# EAGLE board krajBB-Mojžiš_Matej7 (EAGLE 7.7.0)
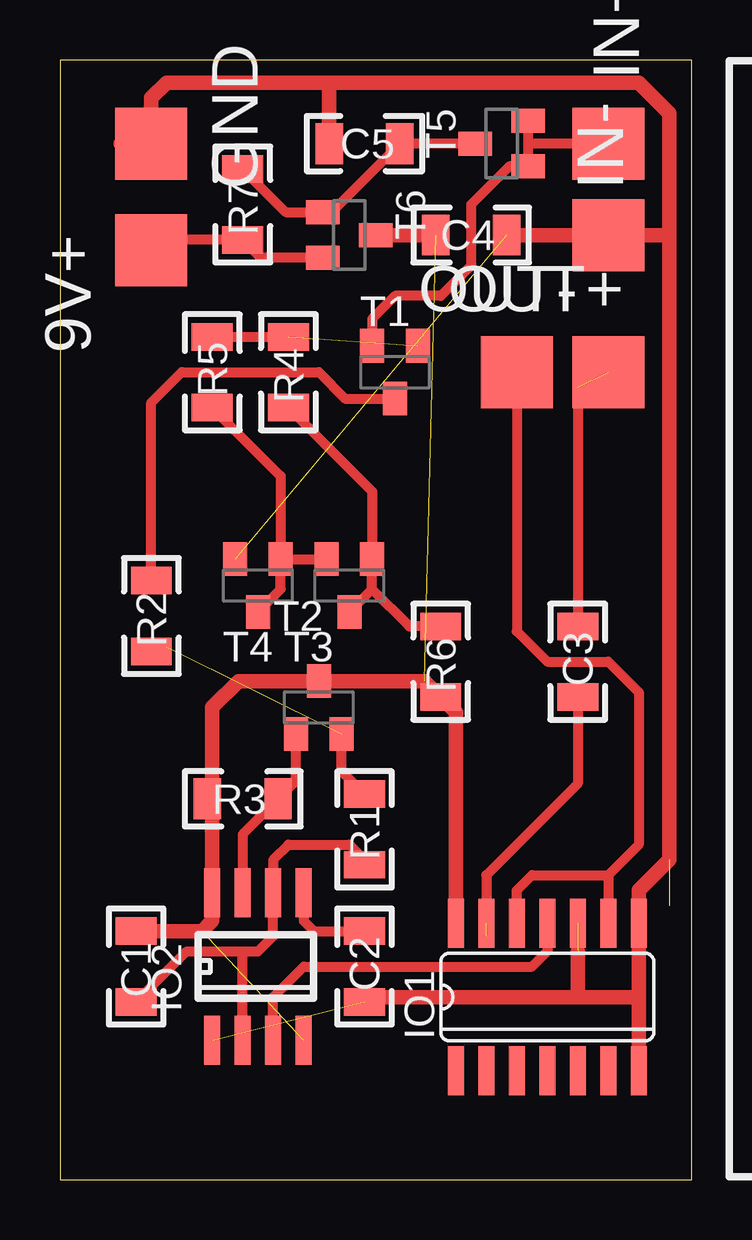
[diagram p0: board, top side]

Size 26.34 x 46.66 mm. Coordinates in mm from the lower left corner, seen from the top.
Outline: 0,0 26.34,0 26.34,46.66 0,46.66 0,0
Copper layers (1*16): Top 0.035mm / dielectric 1.5mm / Bottom 0.035mm
Design rules "default *": minimum track width 10mil, minimum drill 24mil, track to track 8mil, track to pad 8mil, pad to pad 8mil, via to via 8mil, smd to smd 8mil, copper to edge 16mil, drill to drill 8mil, minimum pad ring 10mil, minimum via ring 8mil, stop-mask expansion 4mil, vias tented up to drill 0mil, thermal gap 10mil

## Footprints (pad centres in the part's own frame; a part is rotated, then mirrored left to right if it is on the bottom)
SMD3X3 = smd 3 x 3: P$1 0,0
1206 = smd 1.143 x 1.702: 1 -1.473,0; 2 1.473,0
SO14 = smd 0.66 x 2.032: 1 -3.81,-3.073; 2 -2.54,-3.073; 3 -1.27,-3.073; 4 0,-3.073; 5 1.27,-3.073; 6 2.54,-3.073; 7 3.81,-3.073; 8 3.81,3.073; 9 2.54,3.073; 10 1.27,3.073; 11 0,3.073; 12 -1.27,3.073; 13 -2.54,3.073; 14 -3.81,3.073
SO08 = smd 0.66 x 2.032: 1 -1.905,-3.073; 2 -0.635,-3.073; 3 0.635,-3.073; 4 1.905,-3.073; 5 1.905,3.073; 6 0.635,3.073; 7 -0.635,3.073; 8 -1.905,3.073
LD-DR-3519 = drill 1 pad 1.93 long: P$1 -3,-15; P$2 3,-15
SOT23-BEC = smd 1 x 1.4: B -0.95,-1.1; C 0,1.1; E 0.95,-1.1
SOT23 = smd 1 x 1.4: 1 -0.95,-1.1; 2 0.95,-1.1; 3 0,1.1

## Placement (x,y rotation side)
9V+  SMD3X3  [SMD3X3]  3.81,38.73 270 top
C1  1u  [1206]  3.17,8.89 90 top
C2  1u  [1206]  12.7,8.89 90 top
C3  1u  [1206]  21.59,21.59 90 top
C4  1u  [1206]  17.14,39.37 180 top
C5  1u  [1206]  12.7,43.18 0 top
GND  SMD3X3  [SMD3X3]  3.81,43.18 90 top
IN+  SMD3X3  [SMD3X3]  22.86,43.18 270 top
IN-  SMD3X3  [SMD3X3]  22.86,39.37 90 top
IO1  4013D  [SO14]  20.32,7.62 0 top
IO2  NE555D  [SO08]  8.26,8.89 0 top
OUT+  SMD3X3  [SMD3X3]  22.86,33.66 180 top
OUT-  SMD3X3  [SMD3X3]  19.05,33.66 180 top
R1  100  [1206]  12.7,14.61 270 top
R2  470  [1206]  3.81,23.5 270 top
R3  10k  [1206]  7.62,15.88 180 top
R4  10k  [1206]  9.53,33.66 270 top
R5  2.2k  [1206]  6.35,33.66 90 top
R6  47k  [1206]  15.88,21.59 270 top
R7  10M  [1206]  7.62,40.64 270 top
REPRODUKTOR  LD-DR-3519  [LD-DR-3519]  73.03,23.5 0 top  (outside the outline)
T1  BC817-25  [SOT23-BEC]  13.97,33.66 180 top
T2  BC817-25  [SOT23-BEC]  10.79,19.68 0 top
T3  BC817-25  [SOT23-BEC]  12.06,24.77 180 top
T4  BC817-25  [SOT23-BEC]  8.26,24.77 180 top
T5  BSS84  [SOT23]  18.41,43.18 90 top
T6  BSS84  [SOT23]  12.06,39.37 270 top
U$1  9VBATTERY  [9VBATTERY]  41.91,24.13 0 top  (outside the outline)

## Library data of the parts
9V+ GND IN+ IN- OUT+ OUT- = solpad
C1-C5 R1-R7 = rcl
IO1 = 40xx
IO2 = linear
REPRODUKTOR = buzzer
T1-T4 = transistor-npn
T5 T6 = transistor-small-signal
U$1 = battery

## Nets
9V_1: R4.2 R6.1 T3.B T3.C
9V_2: R5.1 T3.E T4.B T4.C
+9V: C1.2 C4.2 IO1.14 IO2.4 IO2.8 R3.2 R6.2 T2.C T6.3
CLOCK: IO1.11 IO2.3
CV: C2.2 IO2.5
DIS: IO2.7 R3.1 T2.B
DIS_1: R2.1 T1.C
DIS_IN: R1.1 R2.2 T2.E
DIV: R4.1 R5.2 T1.B
GND: C2.1 C4.1 C5.1 GND.P$1 IN-.P$1 IO1.7 IO1.8 IO1.10 IO2.1 T4.E
IN: IN+.P$1 T1.E T5.1 T5.2
MOS: C5.2 R7.1 T5.3 T6.1
OUT: C3.1 IO1.13
REP: C3.2 OUT+.P$1
REP+: IO1.9 IO1.12 OUT-.P$1
THR: C1.1 IO2.2 IO2.6 R1.2
VIN: 9V+.P$1 R7.2 T6.2

## Tracks (layer width: path | path; a pad name or v marks a point on that pad's centre or on a via)
9V_1
  Top 0.406: T3.C 13.02,24.61 | 13.02,24.61 T3.B | 13.02,26.79 T3.B | R6.1 14.57,23.06 13.02,24.61 | R4.2 13.02,28.69 T3.B
9V_2
  Top 0.406: 9.21,26.79 T4.B | T4.C 9.21,24.61 T4.B | T4.B T3.E | R5.1 9.21,29.33 T4.B
+9V  (2 unrouted)
  Top 0.61: C1.2 5.92,10.36 6.35,10.79 IO2.8 6.35,15.67 R3.2 6.35,16.08 6.35,19.68 7.45,20.79 T2.C 15.21,20.79 R6.2 16.51,19.48 IO1.14 | T6.3 C4.2
CLOCK
  Top 0.406: IO1.11 20.32,9.53 19.68,8.89 10.16,8.89 8.89,7.62 IO2.3
CV
  Top 0.406: IO2.5 10.16,10.79 10.59,10.36 C2.2
DIS
  Top 0.406: T2.B 9.85,16.63 R3.1 7.62,14.4 IO2.7
DIS_1
  Top 0.406: R2.1 3.81,32.38 5.08,33.66 10.79,33.66 11.89,32.55 T1.C
DIS_IN  (1 unrouted)
  Top 0.406: T2.E 11.74,17.03 R1.1 13.13,16.08 | 4.45,22.23 4.24,22.02 R2.2
DIV  (1 unrouted)
  Top 0.406: R5.2 R4.1
GND  (4 unrouted)
  Top 0.406: IO2.1 6.25,5.71
  Top 0.61: 24.13,7.62 IO1.8 24.13,12.06 25.4,13.34 25.4,39.37 | 24.13,7.62 IO1.7 | 11.23,45.72 4.45,45.72 3.81,45.09 GND.P$1 2.54,43.18 | 11.23,45.72 24.13,45.72 25.4,44.45 25.4,39.37 | C5.1 11.23,45.72 | C4.1 IN-.P$1 25.4,39.37 | C2.1 12.9,7.62 21.59,7.62 | 21.59,7.62 24.13,7.62 | 21.59,9.53 21.59,7.62
IN
  Top 0.406: T5.2 19.52,43.18 | 19.52,43.18 T5.1 18.73,42.23 17.14,40.64 17.14,38.1 15.88,36.83 13.97,36.83 13.02,35.88 T1.E | IN+.P$1 19.52,43.18
MOS
  Top 0.406: T5.3 C5.2 11.31,40.32 T6.1 9.41,40.32 R7.1
OUT  (1 unrouted)
  Top 0.406: C3.1 21.59,16.51 17.78,12.7 17.78,10.16
REP  (1 unrouted)
  Top 0.406: 21.59,33.02 C3.2
REP+
  Top 0.406: OUT-.P$1 19.05,22.86 20.32,21.59 22.86,21.59 24.13,20.32 24.13,13.97 22.86,12.7 | 22.86,12.7 IO1.9 | IO1.12 19.05,12.06 19.68,12.7 22.86,12.7
THR
  Top 0.406: R1.2 12.7,13.34 12.06,13.97 9.53,13.97 8.89,13.34 IO2.6 8.89,10.16 8.26,9.53 7.62,9.53 | 7.62,9.53 5.28,9.53 C1.1 | IO2.2 7.62,9.53
VIN
  Top 0.406: T6.2 8.37,38.42 R7.2 4.24,39.17 9V+.P$1